# EAGLE board VU Meter (EAGLE 5.11)
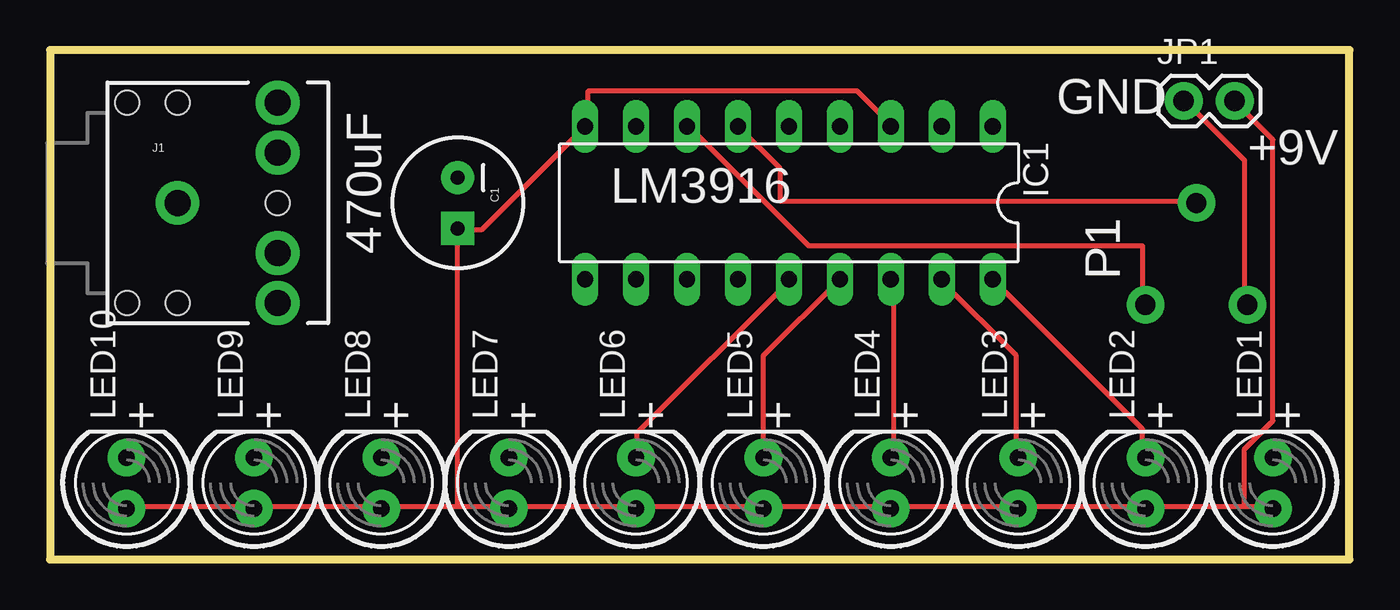
[diagram p0: board, top side]
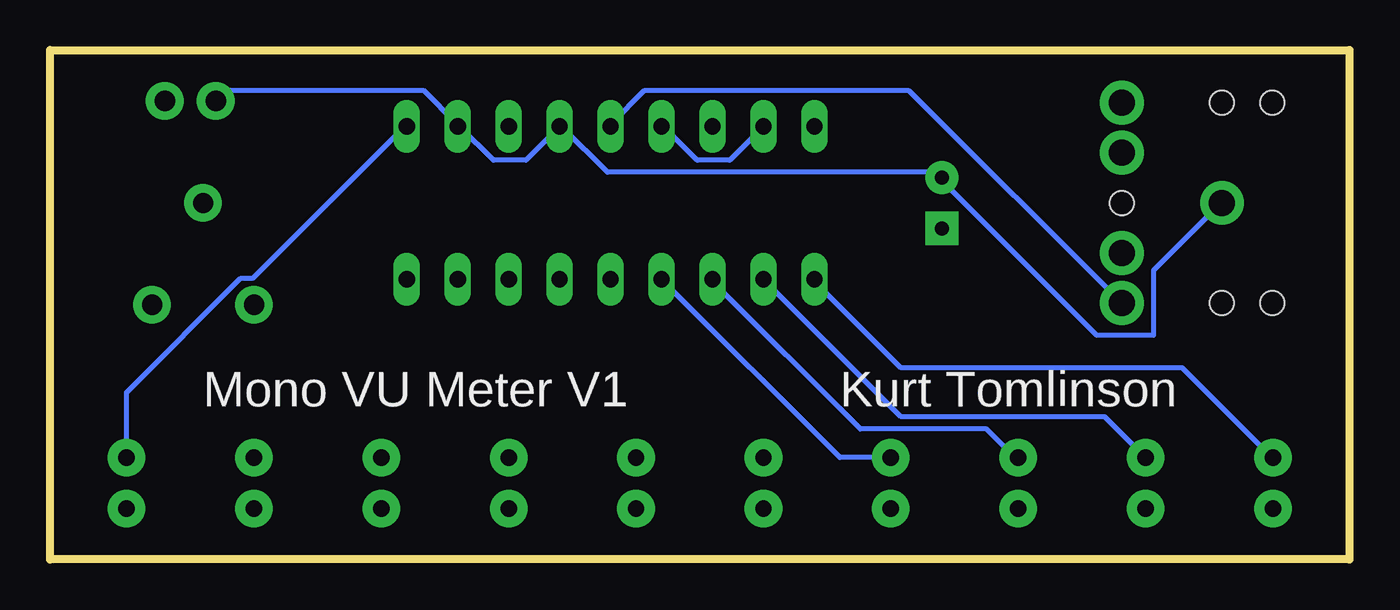
[diagram p1: board, bottom side, seen from below]

Size 64.77 x 25.4 mm. Coordinates in mm from the lower left corner, seen from the top.
Outline: 0,0 64.77,0 64.77,25.4 0,25.4 0,0
Copper layers (1*16): Top 0.035mm / dielectric 1.5mm / Bottom 0.035mm
Design rules "default": minimum track width 10mil, minimum drill 24mil, track to track 8mil, track to pad 8mil, pad to pad 8mil, via to via 8mil, smd to smd 8mil, copper to edge 40mil, drill to drill 8mil, minimum pad ring 10mil, minimum via ring 8mil, stop-mask expansion 4mil, vias tented up to drill 0mil, thermal gap 10mil

## Footprints (pad centres in the part's own frame; a part is rotated, then mirrored left to right if it is on the bottom)
CPOL-RADIAL-100UF-25V = drill 0.7 pad 1.651 square: 1 1.27,0 | drill 0.7 pad 1.651 round: 2 -1.27,0
DIL18 = drill 0.813 long: 1 -10.16,-3.81; 2 -7.62,-3.81; 3 -5.08,-3.81; 4 -2.54,-3.81; 5 0,-3.81; 6 2.54,-3.81; 7 5.08,-3.81; 8 7.62,-3.81; 9 10.16,-3.81; 10 10.16,3.81; 11 7.62,3.81; 12 5.08,3.81; 13 2.54,3.81; 14 0,3.81; 15 -2.54,3.81; 16 -5.08,3.81; 17 -7.62,3.81; 18 -10.16,3.81
AUDIO-JACK = drill 1.3 pad 2.184 round: 1 0,0; 2 5,5; 3 5,2.5; 4 5,-2.5; 5 5,-5 | hole 1.2: 0,5; -2.5,5; -2.5,-5; 0,-5; 5,0
1X02 = drill 1.016 pad 1.88 round: 1 0,0; 2 2.54,0
LED5MM = drill 0.813 pad 1.88 round: A -1.27,0; K 1.27,0
TRIM_POT = drill 1 pad 1.88 round: 1 5.08,0; 2 0,2.54; 3 0,-2.54

## Placement (x,y rotation side)
C1  470u  [CPOL-RADIAL-100UF-25V]  20.32,17.78 270 top
IC1  LM3916  [DIL18]  36.83,17.78 180 top
J1  AUDIO-JACK  [AUDIO-JACK]  6.35,17.78 0 top
JP1  [1X02]  56.52,22.86 0 top
LED1  [LED5MM]  60.96,3.81 90 top
LED2  [LED5MM]  54.61,3.81 90 top
LED3  [LED5MM]  48.26,3.81 90 top
LED4  [LED5MM]  41.91,3.81 90 top
LED5  [LED5MM]  35.56,3.81 90 top
LED6  [LED5MM]  29.21,3.81 90 top
LED7  [LED5MM]  22.86,3.81 90 top
LED8  [LED5MM]  16.51,3.81 90 top
LED9  [LED5MM]  10.16,3.81 90 top
LED10  [LED5MM]  3.81,3.81 90 top
P1  10k  [TRIM_POT]  57.15,12.7 90 top

## Library data of the parts
C1 J1 JP1 LED1-LED10 P1 = SparkFun
IC1 = ic-package

## Nets
+9V: C1.1 IC1.3 IC1.9 JP1.2 LED1.A LED2.A LED3.A LED4.A LED5.A LED6.A LED7.A LED8.A LED9.A LED10.A
GND: C1.2 IC1.2 IC1.4 J1.1 JP1.1 P1.3
N$1: IC1.1 LED1.K
N$2: IC1.18 LED2.K
N$3: IC1.17 LED3.K
N$4: IC1.16 LED4.K
N$5: IC1.15 LED5.K
N$6: IC1.14 LED6.K
N$7: IC1.13 LED7.K
N$8: IC1.12 LED8.K
N$9: IC1.11 LED9.K
N$10: IC1.10 LED10.K
N$11: IC1.7 P1.2
N$12: IC1.6 IC1.8 P1.1
SIGNAL: IC1.5 J1.5

## Tracks (layer width: path | path; a pad name or v marks a point on that pad's centre or on a via)
+9V
  Top 0.254: 59.54,2.64 54.66,2.64 LED2.A 54.46,2.64 48.36,2.64 LED3.A 48.16,2.64 42.06,2.64 LED4.A 41.86,2.64 35.56,2.64 | 59.54,2.64 60.96,2.64 LED1.A | 59.54,2.64 59.54,5.49 60.96,6.91 60.96,20.93 59.13,22.76 JP1.2 | 20.32,16.46 21.54,16.46 IC1.9 26.82,21.74 26.82,23.37 40.23,23.37 41.86,21.74 IC1.3 | 10.16,2.64 3.86,2.64 LED10.A | 20.32,2.64 22.76,2.64 LED7.A 22.96,2.64 29.06,2.64 LED6.A 29.26,2.64 35.56,2.64 | 20.32,2.64 16.66,2.64 LED8.A 16.46,2.64 10.16,2.64 | 10.16,2.64 LED9.A | 20.32,2.64 20.32,16.46 | 20.32,16.46 C1.1 | 35.56,2.64 LED5.A
GND
  Top 0.254: JP1.1 56.69,22.76 59.54,19.91 59.54,12.8 P1.3
  Bottom 0.254: J1.1 6.5,17.68 9.75,14.43 9.75,11.18 12.6,11.18 20.32,18.9 C1.2 20.32,19.1 20.52,19.3 36.98,19.3 39.22,21.54 IC1.4 41.05,19.91 42.67,19.91 44.3,21.54 IC1.2 44.5,21.74 46.13,23.37 56.08,23.37 56.49,22.96 JP1.1
N$1
  Bottom 0.254: LED1.K 60.96,8.33 55.27,14.02 54.66,14.02 47.14,21.54 IC1.1
N$2
  Top 0.254: IC1.18 54.46,6.5 54.46,5.08 LED2.K
N$3
  Top 0.254: IC1.17 44.5,13.82 48.16,10.16 48.16,5.08 LED3.K
N$4
  Top 0.254: IC1.16 42.06,13.82 42.06,5.08 LED4.K
N$5
  Top 0.254: LED5.K 35.56,10.16 IC1.15
N$6
  Top 0.254: IC1.14 36.78,13.82 29.26,6.3 29.26,5.08 LED6.K
N$7
  Bottom 0.254: IC1.13 25.4,5.08 LED7.K
N$8
  Bottom 0.254: IC1.12 31.7,13.82 24.38,6.5 18.09,6.5 16.66,5.08 LED8.K
N$9
  Bottom 0.254: LED9.K 12.19,7.11 22.35,7.11 IC1.11
N$10
  Bottom 0.254: IC1.10 26.62,13.82 22.35,9.55 8.33,9.55 3.86,5.08 LED10.K
N$11
  Top 0.254: IC1.7 31.9,21.54 37.8,15.65 54.46,15.65 54.46,12.8 P1.2
N$12
  Top 0.254: P1.1 57.1,17.88 36.37,17.88 36.37,19.51 IC1.6
  Bottom 0.254: IC1.8 30.89,19.91 32.51,19.91 34.14,21.54 IC1.6
SIGNAL
  Bottom 0.254: IC1.5 36.78,21.74 35.15,23.37 21.95,23.37 11.38,12.8 J1.5

## Text on the board
tPlace: GND | +9V | LM3916 | 470uF | P1 | + | + | + | + | + | + | + | + | + | +
bPlace: Kurt Tomlinson | Mono VU Meter V1